# Altium PCB PCB1.PcbDoc (part 2 of 5)
Units mil, origin at the board's own origin, x right, y up, seen from the top; angles counter-clockwise.
Board outline 1280 x 1960 mil, 2 copper layers (Top Layer, Bottom Layer); 43 components, 63 nets, 300 pads, 93 vias.
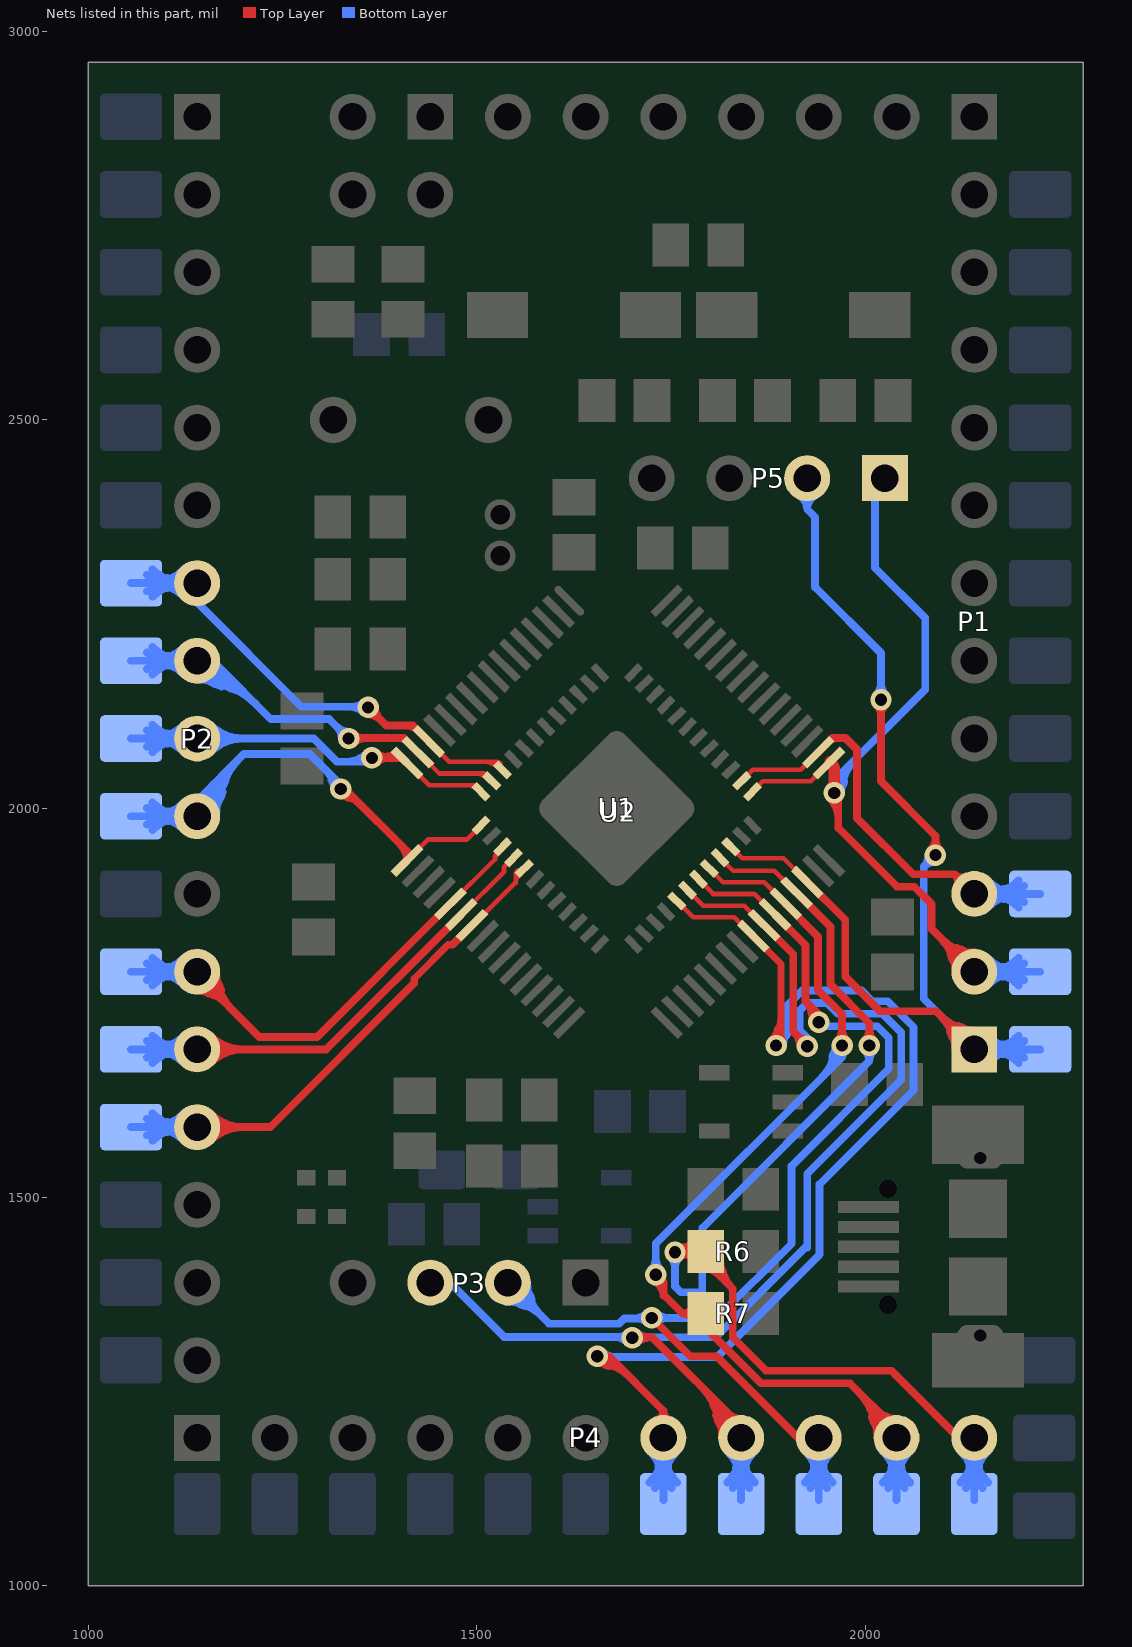
[diagram p2: the nets of this part, all layers, seen from the top]

## Via types
v1: diameter 27.56, hole 15.75, Top Layer to Bottom Layer, tented both sides, 87 vias
v2: diameter 23.62, hole 13.78, Top Layer to Bottom Layer, tented both sides, 6 vias

## Nets (pads, with @x,y where several pads share a name; then routed paths per layer and width w, separated by ;. In a path a pad name is that pad's centre, name@x,y a point inside that pad or via, vN(x,y) a via of type N, cw(c..) or ccw(c..) an arc to the next point about the centre after c; other vN are vias at no path point) (continued)
PA0: P2.7 pad.1@1055,2290 U1.10 U2.14 | length 1775.8
  Top Layer w6: U2.14@1438.08,2086.28 1464.37,2060 1522.56,2060 U1.10@1533.15,2049.41 ; 1518.76,2057.93 ccw(c1524.24,2067.44) U1.10@1527.08,2056.84 ; 1510.83,2060 cw(c1510.83,2038.23) 1526.22,2053.62 ccw(c1510.83,2038.23) 1510.83,2060 ; 1525.31,2060 cw(c1525.31,2052.71) 1530.47,2057.87 ccw(c1525.31,2052.71) 1525.31,2060
  Top Layer w10: v1@1358.8,2129.76 ccw(c1372.87,2132.64) 1369.15,2118.77 ; v1(1360,2130) 1383.34,2106.66 1417.71,2106.66 U2.14@1438.08,2086.28 ; v1@1360.24,2131.2 cw(c1357.36,2117.13) 1371.23,2120.85 ; 1374.99,2115.01 cw(c1389.98,2130) 1368.78,2130 ccw(c1389.98,2130) 1374.99,2115.01 ; 1374.99,2115.01 ccw(c1360,2100.02) 1360,2121.22 cw(c1360,2100.02) 1374.99,2115.01 ; 1408.89,2106.66 cw(c1408.89,2085.38) 1423.94,2100.43 ccw(c1408.89,2085.38) 1408.89,2106.66
  Bottom Layer w10: pad.1@1055,2290 P2.7@1140,2290 1140,2265 1274,2131 1359,2131 v1(1360,2130) ; P2.7@1116.78,2282.1 ccw(c1095.78,2274.96) 1101.52,2296.39 ccw(c1105.72,2312.07) P2.7@1119.38,2303.28 ; P2.7@1116.78,2297.9 cw(c1095.78,2305.04) 1101.52,2283.61 cw(c1105.72,2267.93) P2.7@1119.38,2276.72 ; pad.1@1080.79,2290 cw(c1080.79,2230.79) 1122.66,2272.66 ccw(c1080.79,2230.79) pad.1@1080.79,2290 ; pad.1@1080.79,2290 ccw(c1080.79,2349.21) 1122.66,2307.34 cw(c1080.79,2349.21) pad.1@1080.79,2290 ; pad.1@1086.36,2277.01 cw(c1099.56,2268.97) 1103.56,2283.9 ; pad.1@1086.36,2277.01 cw(c1099.56,2268.97) 1103.56,2283.9 ; pad.1@1086.36,2277.01 cw(c1099.56,2268.97) 1103.56,2283.9 ; pad.1@1086.36,2302.99 ccw(c1099.56,2311.03) 1103.56,2296.1 ; pad.1@1086.36,2302.99 ccw(c1099.56,2311.03) 1103.56,2296.1 ; pad.1@1086.36,2302.99 ccw(c1099.56,2311.03) 1103.56,2296.1 ; pad.1@1088.73,2282.12 cw(c1109.12,2275.35) 1103.56,2296.1 ; pad.1@1088.73,2282.12 cw(c1109.12,2275.35) 1103.56,2296.1 ; pad.1@1088.73,2282.12 cw(c1109.12,2275.35) 1103.56,2296.1 ; pad.1@1088.73,2297.88 ccw(c1109.12,2304.65) 1103.56,2283.9 ; pad.1@1088.73,2297.88 ccw(c1109.12,2304.65) 1103.56,2283.9 ; pad.1@1088.73,2297.88 ccw(c1109.12,2304.65) 1103.56,2283.9 ; 1101.21,2290 cw(c1101.21,2326.21) 1075.61,2300.61 ccw(c1101.21,2326.21) 1101.21,2290 ; 1101.21,2290 ccw(c1101.21,2253.79) 1075.61,2279.39 cw(c1101.21,2253.79) 1101.21,2290 ; 1104.93,2290 cw(c1104.93,2254.93) 1129.73,2279.73 ccw(c1104.93,2254.93) 1104.93,2290 ; 1104.93,2290 ccw(c1104.93,2325.07) 1129.73,2300.27 cw(c1104.93,2325.07) 1104.93,2290 ; P2.7@1125.36,2290 cw(c1125.36,2350.36) 1082.68,2307.68 ccw(c1125.36,2350.36) P2.7@1125.36,2290 ; P2.7@1125.36,2290 ccw(c1125.36,2229.64) 1082.68,2272.32 cw(c1125.36,2229.64) P2.7@1125.36,2290 ; 1336.39,2131 cw(c1336.39,2106.39) 1353.79,2123.79 ccw(c1336.39,2106.39) 1336.39,2131 ; 1341.22,2131 ccw(c1341.22,2148.78) 1353.79,2136.21 cw(c1341.22,2148.78) 1341.22,2131
PA1: P2.8 pad.1@1055,2190 U1.11 U2.15 | length 2194.5
  Top Layer w6: U2.15@1424.17,2072.36 1451.53,2045 1509.72,2045 U1.11@1519.23,2035.49 ; 1505.13,2043.85 ccw(c1510.22,2052.67) U1.11@1513.12,2042.9 ; 1499.52,2045 cw(c1499.52,2026.92) 1512.3,2039.7 ccw(c1499.52,2026.92) 1499.52,2045
  Top Layer w10: v1(1335,2090) 1335.66,2090.66 1405.87,2090.66 U2.15@1424.17,2072.36 ; v1@1341.21,2083.79 cw(c1357.79,2067.21) 1357.79,2090.66 ccw(c1357.79,2067.21) v1@1341.21,2083.79 ; v1@1341.21,2096.21 ccw(c1354.6,2109.6) 1354.6,2090.66 cw(c1354.6,2109.6) v1@1341.21,2096.21 ; 1400,2090.66 cw(c1400,2076.48) 1410.02,2086.51 ccw(c1400,2076.48) 1400,2090.66
  Bottom Layer w10: pad.1@1055,2190 P2.8@1140,2190 1160,2190 1235,2115 1310,2115 v1(1335,2090) ; P2.8@1116.78,2182.1 ccw(c1095.78,2174.96) 1101.52,2196.39 ccw(c1105.72,2212.07) P2.8@1119.38,2203.28 ; P2.8@1116.78,2197.9 cw(c1095.78,2205.04) 1101.52,2183.61 cw(c1105.72,2167.93) P2.8@1119.38,2176.72 ; P2.8@1135.03,2187.7 ccw(c1186.01,2211.29) 1171.47,2157.04 ; P2.8@1144.11,2191.9 ccw(c1211.26,2222.98) 1192.11,2151.51 ; P2.8@1144.3,2191.41 ccw(c1178.9,2202.74) 1169.48,2167.57 ; pad.1@1080.79,2190 cw(c1080.79,2130.79) 1122.66,2172.66 ccw(c1080.79,2130.79) pad.1@1080.79,2190 ; pad.1@1080.79,2190 ccw(c1080.79,2249.21) 1122.66,2207.34 cw(c1080.79,2249.21) pad.1@1080.79,2190 ; pad.1@1086.36,2177.01 cw(c1099.56,2168.97) 1103.56,2183.9 ; pad.1@1086.36,2177.01 cw(c1099.56,2168.97) 1103.56,2183.9 ; pad.1@1086.36,2177.01 cw(c1099.56,2168.97) 1103.56,2183.9 ; pad.1@1086.36,2202.99 ccw(c1099.56,2211.03) 1103.56,2196.1 ; pad.1@1086.36,2202.99 ccw(c1099.56,2211.03) 1103.56,2196.1 ; pad.1@1086.36,2202.99 ccw(c1099.56,2211.03) 1103.56,2196.1 ; pad.1@1088.73,2182.12 cw(c1109.12,2175.35) 1103.56,2196.1 ; pad.1@1088.73,2182.12 cw(c1109.12,2175.35) 1103.56,2196.1 ; pad.1@1088.73,2182.12 cw(c1109.12,2175.35) 1103.56,2196.1 ; pad.1@1088.73,2197.88 ccw(c1109.12,2204.65) 1103.56,2183.9 ; pad.1@1088.73,2197.88 ccw(c1109.12,2204.65) 1103.56,2183.9 ; pad.1@1088.73,2197.88 ccw(c1109.12,2204.65) 1103.56,2183.9 ; 1101.21,2190 cw(c1101.21,2226.21) 1075.61,2200.61 ccw(c1101.21,2226.21) 1101.21,2190 ; 1101.21,2190 ccw(c1101.21,2153.79) 1075.61,2179.39 cw(c1101.21,2153.79) 1101.21,2190 ; 1104.93,2190 cw(c1104.93,2154.93) 1129.73,2179.73 ccw(c1104.93,2154.93) 1104.93,2190 ; 1104.93,2190 ccw(c1104.93,2225.07) 1129.73,2200.27 cw(c1104.93,2225.07) 1104.93,2190 ; P2.8@1125.36,2190 cw(c1125.36,2250.36) 1082.68,2207.68 ccw(c1125.36,2250.36) P2.8@1125.36,2190 ; P2.8@1125.36,2190 ccw(c1125.36,2129.64) 1082.68,2172.32 cw(c1125.36,2129.64) P2.8@1125.36,2190 ; 1320.01,2104.99 cw(c1305.02,2090) 1326.22,2090 ccw(c1305.02,2090) 1320.01,2104.99 ; 1320.01,2104.99 ccw(c1335,2119.98) 1335,2098.78 cw(c1335,2119.98) 1320.01,2104.99 ; P2.8@1140,2165.47 cw(c1140,2057.97) 1216.01,2133.99 ccw(c1140,2057.97) P2.8@1140,2165.47 ; P2.8@1140,2175.47 cw(c1140,2092.12) 1198.94,2151.06 ccw(c1140,2092.12) P2.8@1140,2175.47 ; P2.8@1140,2185.47 cw(c1140,2126.26) 1181.87,2168.13 ccw(c1140,2126.26) P2.8@1140,2185.47
PA2: P2.9 pad.1@1055,2090 U1.12 U2.16 | length 1956.8
  Top Layer w6: U2.16@1410.25,2058.45 1438.69,2030 1496.89,2030 U1.12@1505.31,2021.58 ; 1492.86,2028.97 ccw(c1495.97,2034.36) U1.12@1498.85,2028.85 ; 1488.21,2030 cw(c1488.21,2015.61) 1498.39,2025.79 ccw(c1488.21,2015.61) 1488.21,2030
  Top Layer w10: v1(1365,2065) 1403.69,2065 U2.16@1410.25,2058.45 ; v1@1371.44,2070.96 ccw(c1381.62,2080.37) 1385.2,2066.99 ; v1@1371.44,2070.96 ccw(c1381.62,2080.37) 1385.2,2066.99 ; v1@1371.44,2070.96 ccw(c1381.62,2080.37) 1385.2,2066.99 ; 1386.2,2065 cw(c1386.2,2086.2) 1371.21,2071.21 ccw(c1386.2,2086.2) 1386.2,2065 ; 1386.2,2065 ccw(c1386.2,2043.8) 1371.21,2058.79 cw(c1386.2,2043.8) 1386.2,2065 ; v1@1377.78,2065 ccw(c1377.78,2090.91) 1396.1,2072.59 cw(c1377.78,2090.91) v1@1377.78,2065 ; U2.16@1401.93,2065 ccw(c1401.93,2066.77) 1403.17,2065.52 cw(c1401.93,2066.77) U2.16@1401.93,2065
  Bottom Layer w10: pad.1@1055,2090 P2.9@1140,2090 1290,2090 1320,2060 v1@1370,2060 ; P2.9@1116.78,2082.1 ccw(c1095.78,2074.96) 1101.52,2096.39 ccw(c1105.72,2112.07) P2.9@1119.38,2103.28 ; P2.9@1116.78,2097.9 cw(c1095.78,2105.04) 1101.52,2083.61 cw(c1105.72,2067.93) P2.9@1119.38,2076.72 ; pad.1@1080.79,2090 cw(c1080.79,2030.79) 1122.66,2072.66 ccw(c1080.79,2030.79) pad.1@1080.79,2090 ; pad.1@1080.79,2090 ccw(c1080.79,2149.21) 1122.66,2107.34 cw(c1080.79,2149.21) pad.1@1080.79,2090 ; pad.1@1086.36,2077.01 cw(c1099.56,2068.97) 1103.56,2083.9 ; pad.1@1086.36,2077.01 cw(c1099.56,2068.97) 1103.56,2083.9 ; pad.1@1086.36,2077.01 cw(c1099.56,2068.97) 1103.56,2083.9 ; pad.1@1086.36,2102.99 ccw(c1099.56,2111.03) 1103.56,2096.1 ; pad.1@1086.36,2102.99 ccw(c1099.56,2111.03) 1103.56,2096.1 ; pad.1@1086.36,2102.99 ccw(c1099.56,2111.03) 1103.56,2096.1 ; pad.1@1088.73,2082.12 cw(c1109.12,2075.35) 1103.56,2096.1 ; pad.1@1088.73,2082.12 cw(c1109.12,2075.35) 1103.56,2096.1 ; pad.1@1088.73,2082.12 cw(c1109.12,2075.35) 1103.56,2096.1 ; pad.1@1088.73,2097.88 ccw(c1109.12,2104.65) 1103.56,2083.9 ; pad.1@1088.73,2097.88 ccw(c1109.12,2104.65) 1103.56,2083.9 ; pad.1@1088.73,2097.88 ccw(c1109.12,2104.65) 1103.56,2083.9 ; 1101.21,2090 cw(c1101.21,2126.21) 1075.61,2100.61 ccw(c1101.21,2126.21) 1101.21,2090 ; 1101.21,2090 ccw(c1101.21,2053.79) 1075.61,2079.39 cw(c1101.21,2053.79) 1101.21,2090 ; 1104.93,2090 cw(c1104.93,2054.93) 1129.73,2079.73 ccw(c1104.93,2054.93) 1104.93,2090 ; 1104.93,2090 ccw(c1104.93,2125.07) 1129.73,2100.27 cw(c1104.93,2125.07) 1104.93,2090 ; P2.9@1125.36,2090 cw(c1125.36,2150.36) 1082.68,2107.68 ccw(c1125.36,2150.36) P2.9@1125.36,2090 ; P2.9@1125.36,2090 ccw(c1125.36,2029.64) 1082.68,2072.32 cw(c1125.36,2029.64) P2.9@1125.36,2090 ; 1175.07,2090 cw(c1175.07,2125.07) 1150.27,2100.27 ccw(c1175.07,2125.07) 1175.07,2090 ; 1175.07,2090 ccw(c1175.07,2054.93) 1150.27,2079.73 cw(c1175.07,2054.93) 1175.07,2090 ; 1199.21,2090 cw(c1199.21,2149.21) 1157.34,2107.34 ccw(c1199.21,2149.21) 1199.21,2090 ; 1199.21,2090 ccw(c1199.21,2030.79) 1157.34,2072.66 cw(c1199.21,2030.79) 1199.21,2090 ; 1331.73,2060 ccw(c1331.73,2098.27) 1358.79,2071.21 cw(c1331.73,2098.27) 1331.73,2060
PA3: P2.10 pad.1@1055,1990 U1.13 U2.17 | length 2241.7
  Top Layer w6: U2.17@1410.25,1933.17 1437.08,1960 1486.89,1960 U1.13@1505.31,1978.42
  Top Layer w10: v1@1323.86,2024.55 ccw(c1341.63,2031.52) 1336.69,2013.09 ; v1(1325,2025) 1330,2025 U2.17@1416.04,1938.96 ; v1@1325,2016.22 cw(c1325,1982.95) 1348.52,2006.48 ccw(c1325,1982.95) v1@1325,2016.22 ; 1402.05,1952.95 cw(c1382.28,1933.17) U2.17@1410.25,1933.17 ccw(c1382.28,1933.17) 1402.05,1952.95
  Bottom Layer w10: pad.1@1055,1990 P2.10@1140,1990 1140,2010 1200,2070 1285,2070 1330,2025 v1(1325,2025) ; P2.10@1116.78,1982.1 ccw(c1095.78,1974.96) 1101.52,1996.39 ccw(c1105.72,2012.07) P2.10@1119.38,2003.28 ; P2.10@1116.78,1997.9 cw(c1095.78,2005.04) 1101.52,1983.61 cw(c1105.72,1967.93) P2.10@1119.38,1976.72 ; P2.10@1138.1,1994.11 ccw(c1107.02,2061.26) 1178.49,2042.11 ; P2.10@1138.59,1994.3 ccw(c1127.26,2028.9) 1162.43,2019.48 ; P2.10@1142.3,1985.03 ccw(c1118.71,2036.01) 1172.96,2021.47 ; 1313.09,2036.69 ccw(c1331.52,2041.63) v1@1324.55,2023.86 ; pad.1@1080.79,1990 cw(c1080.79,1930.79) 1122.66,1972.66 ccw(c1080.79,1930.79) pad.1@1080.79,1990 ; pad.1@1080.79,1990 ccw(c1080.79,2049.21) 1122.66,2007.34 cw(c1080.79,2049.21) pad.1@1080.79,1990 ; pad.1@1086.36,1977.01 cw(c1099.56,1968.97) 1103.56,1983.9 ; pad.1@1086.36,1977.01 cw(c1099.56,1968.97) 1103.56,1983.9 ; pad.1@1086.36,1977.01 cw(c1099.56,1968.97) 1103.56,1983.9 ; pad.1@1086.36,2002.99 ccw(c1099.56,2011.03) 1103.56,1996.1 ; pad.1@1086.36,2002.99 ccw(c1099.56,2011.03) 1103.56,1996.1 ; pad.1@1086.36,2002.99 ccw(c1099.56,2011.03) 1103.56,1996.1 ; pad.1@1088.73,1982.12 cw(c1109.12,1975.35) 1103.56,1996.1 ; pad.1@1088.73,1982.12 cw(c1109.12,1975.35) 1103.56,1996.1 ; pad.1@1088.73,1982.12 cw(c1109.12,1975.35) 1103.56,1996.1 ; pad.1@1088.73,1997.88 ccw(c1109.12,2004.65) 1103.56,1983.9 ; pad.1@1088.73,1997.88 ccw(c1109.12,2004.65) 1103.56,1983.9 ; pad.1@1088.73,1997.88 ccw(c1109.12,2004.65) 1103.56,1983.9 ; 1101.21,1990 cw(c1101.21,2026.21) 1075.61,2000.61 ccw(c1101.21,2026.21) 1101.21,1990 ; 1101.21,1990 ccw(c1101.21,1953.79) 1075.61,1979.39 cw(c1101.21,1953.79) 1101.21,1990 ; 1104.93,1990 cw(c1104.93,1954.93) 1129.73,1979.73 ccw(c1104.93,1954.93) 1104.93,1990 ; 1104.93,1990 ccw(c1104.93,2025.07) 1129.73,2000.27 cw(c1104.93,2025.07) 1104.93,1990 ; P2.10@1125.36,1990 cw(c1125.36,2050.36) 1082.68,2007.68 ccw(c1125.36,2050.36) P2.10@1125.36,1990 ; P2.10@1125.36,1990 ccw(c1125.36,1929.64) 1082.68,1972.32 cw(c1125.36,1929.64) P2.10@1125.36,1990 ; P2.10@1144.53,1990 cw(c1203.74,1990) 1161.87,2031.87 ccw(c1203.74,1990) P2.10@1144.53,1990 ; P2.10@1154.53,1990 cw(c1237.88,1990) 1178.94,2048.94 ccw(c1237.88,1990) P2.10@1154.53,1990 ; P2.10@1164.53,1990 cw(c1272.03,1990) 1196.01,2066.01 ccw(c1272.03,1990) P2.10@1164.53,1990 ; 1306.48,2048.52 cw(c1282.95,2025) 1316.22,2025 ccw(c1282.95,2025) 1306.48,2048.52
PA5: P2.12 pad.1@1055,1790 U1.15 U2.21 | length 1949.7
  Top Layer w6: U2.21@1465.92,1877.49 1523.43,1935 1523.43,1938.43 ; 1524.81,1939.4 ccw(c1521.39,1942.64) U1.15@1525.79,1944.33 ; U1.15@1533.15,1950.59 1533.15,1948.15 1523.43,1938.43 ; 1523.43,1938.43 ccw(c1517.91,1943.95) 1525.67,1944.81 cw(c1517.91,1943.95) 1523.43,1938.43 ; 1523.43,1934.17 cw(c1534.23,1934.17) 1528.59,1943.38 ccw(c1534.23,1934.17) 1523.43,1934.17 ; 1523.43,1937.23 cw(c1529.54,1937.23) 1528.05,1943.15 ccw(c1529.54,1937.23) 1523.43,1937.23
  Top Layer w10: P2.12@1134.58,1789.23 ccw(c1169.71,1794.24) 1160.52,1759.97 ; P2.12@1140,1790 1140,1786 1220,1706 1294.43,1706 U2.21@1465.92,1877.49 ; P2.12@1141.39,1795.29 cw(c1130.83,1755.06) 1171,1765.83 ; P2.12@1140,1765.47 cw(c1140,1715.91) 1175.04,1750.96 ccw(c1140,1715.91) P2.12@1140,1765.47 ; P2.12@1154.53,1790 ccw(c1199.26,1790) 1167.63,1758.37 cw(c1199.26,1790) P2.12@1154.53,1790 ; P2.12@1164.53,1790 ccw(c1233.4,1790) 1184.7,1741.3 cw(c1233.4,1790) P2.12@1164.53,1790
  Bottom Layer w10: pad.1@1055,1790 P2.12@1140,1790 ; P2.12@1116.78,1782.1 ccw(c1095.78,1774.96) 1101.52,1796.39 ccw(c1105.72,1812.07) P2.12@1119.38,1803.28 ; P2.12@1116.78,1797.9 cw(c1095.78,1805.04) 1101.52,1783.61 cw(c1105.72,1767.93) P2.12@1119.38,1776.72 ; pad.1@1080.79,1790 cw(c1080.79,1730.79) 1122.66,1772.66 ccw(c1080.79,1730.79) pad.1@1080.79,1790 ; pad.1@1080.79,1790 ccw(c1080.79,1849.21) 1122.66,1807.34 cw(c1080.79,1849.21) pad.1@1080.79,1790 ; pad.1@1086.36,1777.01 cw(c1099.56,1768.97) 1103.56,1783.9 ; pad.1@1086.36,1777.01 cw(c1099.56,1768.97) 1103.56,1783.9 ; pad.1@1086.36,1777.01 cw(c1099.56,1768.97) 1103.56,1783.9 ; pad.1@1086.36,1802.99 ccw(c1099.56,1811.03) 1103.56,1796.1 ; pad.1@1086.36,1802.99 ccw(c1099.56,1811.03) 1103.56,1796.1 ; pad.1@1086.36,1802.99 ccw(c1099.56,1811.03) 1103.56,1796.1 ; pad.1@1088.73,1782.12 cw(c1109.12,1775.35) 1103.56,1796.1 ; pad.1@1088.73,1782.12 cw(c1109.12,1775.35) 1103.56,1796.1 ; pad.1@1088.73,1782.12 cw(c1109.12,1775.35) 1103.56,1796.1 ; pad.1@1088.73,1797.88 ccw(c1109.12,1804.65) 1103.56,1783.9 ; pad.1@1088.73,1797.88 ccw(c1109.12,1804.65) 1103.56,1783.9 ; pad.1@1088.73,1797.88 ccw(c1109.12,1804.65) 1103.56,1783.9 ; 1101.21,1790 cw(c1101.21,1826.21) 1075.61,1800.61 ccw(c1101.21,1826.21) 1101.21,1790 ; 1101.21,1790 ccw(c1101.21,1753.79) 1075.61,1779.39 cw(c1101.21,1753.79) 1101.21,1790 ; 1104.93,1790 cw(c1104.93,1754.93) 1129.73,1779.73 ccw(c1104.93,1754.93) 1104.93,1790 ; 1104.93,1790 ccw(c1104.93,1825.07) 1129.73,1800.27 cw(c1104.93,1825.07) 1104.93,1790 ; P2.12@1125.36,1790 cw(c1125.36,1850.36) 1082.68,1807.68 ccw(c1125.36,1850.36) P2.12@1125.36,1790 ; P2.12@1125.36,1790 ccw(c1125.36,1729.64) 1082.68,1772.32 cw(c1125.36,1729.64) P2.12@1125.36,1790
PA6: P2.13 pad.1@1055,1690 U1.16 U2.22 | length 1833.6
  Top Layer w6: U2.22@1479.84,1863.57 1535,1918.73 1535,1925 1546.67,1936.67 U1.16@1547.07,1936.67 ; 1537.53,1927.53 cw(c1541.5,1923.56) 1541.5,1929.18 ccw(c1541.5,1923.56) 1537.53,1927.53
  Top Layer w10: P2.13@1140,1690 1306.27,1690 U2.22@1479.84,1863.57 ; 1175.07,1690 cw(c1175.07,1725.07) 1150.27,1700.27 ccw(c1175.07,1725.07) 1175.07,1690 ; 1175.07,1690 ccw(c1175.07,1654.93) 1150.27,1679.73 cw(c1175.07,1654.93) 1175.07,1690 ; 1199.21,1690 cw(c1199.21,1749.21) 1157.34,1707.34 ccw(c1199.21,1749.21) 1199.21,1690 ; 1199.21,1690 ccw(c1199.21,1630.79) 1157.34,1672.66 cw(c1199.21,1630.79) 1199.21,1690
  Bottom Layer w10: pad.1@1055,1690 P2.13@1140,1690 ; P2.13@1116.78,1682.1 ccw(c1095.78,1674.96) 1101.52,1696.39 ccw(c1105.72,1712.07) P2.13@1119.38,1703.28 ; P2.13@1116.78,1697.9 cw(c1095.78,1705.04) 1101.52,1683.61 cw(c1105.72,1667.93) P2.13@1119.38,1676.72 ; pad.1@1080.79,1690 cw(c1080.79,1630.79) 1122.66,1672.66 ccw(c1080.79,1630.79) pad.1@1080.79,1690 ; pad.1@1080.79,1690 ccw(c1080.79,1749.21) 1122.66,1707.34 cw(c1080.79,1749.21) pad.1@1080.79,1690 ; pad.1@1086.36,1677.01 cw(c1099.56,1668.97) 1103.56,1683.9 ; pad.1@1086.36,1677.01 cw(c1099.56,1668.97) 1103.56,1683.9 ; pad.1@1086.36,1677.01 cw(c1099.56,1668.97) 1103.56,1683.9 ; pad.1@1086.36,1702.99 ccw(c1099.56,1711.03) 1103.56,1696.1 ; pad.1@1086.36,1702.99 ccw(c1099.56,1711.03) 1103.56,1696.1 ; pad.1@1086.36,1702.99 ccw(c1099.56,1711.03) 1103.56,1696.1 ; pad.1@1088.73,1682.12 cw(c1109.12,1675.35) 1103.56,1696.1 ; pad.1@1088.73,1682.12 cw(c1109.12,1675.35) 1103.56,1696.1 ; pad.1@1088.73,1682.12 cw(c1109.12,1675.35) 1103.56,1696.1 ; pad.1@1088.73,1697.88 ccw(c1109.12,1704.65) 1103.56,1683.9 ; pad.1@1088.73,1697.88 ccw(c1109.12,1704.65) 1103.56,1683.9 ; pad.1@1088.73,1697.88 ccw(c1109.12,1704.65) 1103.56,1683.9 ; 1101.21,1690 cw(c1101.21,1726.21) 1075.61,1700.61 ccw(c1101.21,1726.21) 1101.21,1690 ; 1101.21,1690 ccw(c1101.21,1653.79) 1075.61,1679.39 cw(c1101.21,1653.79) 1101.21,1690 ; 1104.93,1690 cw(c1104.93,1654.93) 1129.73,1679.73 ccw(c1104.93,1654.93) 1104.93,1690 ; 1104.93,1690 ccw(c1104.93,1725.07) 1129.73,1700.27 cw(c1104.93,1725.07) 1104.93,1690 ; P2.13@1125.36,1690 cw(c1125.36,1750.36) 1082.68,1707.68 ccw(c1125.36,1750.36) P2.13@1125.36,1690 ; P2.13@1125.36,1690 ccw(c1125.36,1629.64) 1082.68,1672.32 cw(c1125.36,1629.64) P2.13@1125.36,1690
PA7: P2.14 pad.1@1055,1590 U1.17 U2.23 | length 1955.7
  Top Layer w6: 1463.19,1825 1463.54,1825 ; U2.23@1493.76,1849.65 1494.65,1849.65 1550,1905 1550,1911.76 U1.17@1560.99,1922.75 ; 1551.69,1910.4 ccw(c1546.21,1915.45) U1.17@1553.53,1916.82 ; U2.23@1507.9,1865.8 ccw(c1507.9,1872.78) 1512.84,1867.84 cw(c1507.9,1872.78) U2.23@1507.9,1865.8 ; 1550,1903.85 cw(c1563.85,1903.85) 1556.45,1915.56 ccw(c1563.85,1903.85) 1550,1903.85 ; 1550,1909.52 cw(c1555.75,1909.52) 1555.5,1915.26 ccw(c1555.75,1909.52) 1550,1909.52 ; 1550,1914.74 cw(c1556.96,1914.74) 1553.24,1920.63 ccw(c1556.96,1914.74) 1550,1914.74
  Top Layer w9: 1419.55,1780.66 1419.55,1781.36 1463.19,1825
  Top Layer w10: P2.14@1140,1590 1234.11,1590 1419.55,1775.45 1419.55,1780.66 ; 1463.54,1824.65 1468.75,1824.65 U2.23@1493.76,1849.65 ; 1175.07,1590 cw(c1175.07,1625.07) 1150.27,1600.27 ccw(c1175.07,1625.07) 1175.07,1590 ; 1175.07,1590 ccw(c1175.07,1554.93) 1150.27,1579.73 cw(c1175.07,1554.93) 1175.07,1590 ; 1199.21,1590 cw(c1199.21,1649.21) 1157.34,1607.34 ccw(c1199.21,1649.21) 1199.21,1590 ; 1199.21,1590 ccw(c1199.21,1530.79) 1157.34,1572.66 cw(c1199.21,1530.79) 1199.21,1590
  Bottom Layer w10: pad.1@1055,1590 P2.14@1140,1590 ; P2.14@1116.78,1582.1 ccw(c1095.78,1574.96) 1101.52,1596.39 ccw(c1105.72,1612.07) P2.14@1119.38,1603.28 ; P2.14@1116.78,1597.9 cw(c1095.78,1605.04) 1101.52,1583.61 cw(c1105.72,1567.93) P2.14@1119.38,1576.72 ; pad.1@1080.79,1590 cw(c1080.79,1530.79) 1122.66,1572.66 ccw(c1080.79,1530.79) pad.1@1080.79,1590 ; pad.1@1080.79,1590 ccw(c1080.79,1649.21) 1122.66,1607.34 cw(c1080.79,1649.21) pad.1@1080.79,1590 ; pad.1@1086.36,1577.01 cw(c1099.56,1568.97) 1103.56,1583.9 ; pad.1@1086.36,1577.01 cw(c1099.56,1568.97) 1103.56,1583.9 ; pad.1@1086.36,1577.01 cw(c1099.56,1568.97) 1103.56,1583.9 ; pad.1@1086.36,1602.99 ccw(c1099.56,1611.03) 1103.56,1596.1 ; pad.1@1086.36,1602.99 ccw(c1099.56,1611.03) 1103.56,1596.1 ; pad.1@1086.36,1602.99 ccw(c1099.56,1611.03) 1103.56,1596.1 ; pad.1@1088.73,1582.12 cw(c1109.12,1575.35) 1103.56,1596.1 ; pad.1@1088.73,1582.12 cw(c1109.12,1575.35) 1103.56,1596.1 ; pad.1@1088.73,1582.12 cw(c1109.12,1575.35) 1103.56,1596.1 ; pad.1@1088.73,1597.88 ccw(c1109.12,1604.65) 1103.56,1583.9 ; pad.1@1088.73,1597.88 ccw(c1109.12,1604.65) 1103.56,1583.9 ; pad.1@1088.73,1597.88 ccw(c1109.12,1604.65) 1103.56,1583.9 ; 1101.21,1590 cw(c1101.21,1626.21) 1075.61,1600.61 ccw(c1101.21,1626.21) 1101.21,1590 ; 1101.21,1590 ccw(c1101.21,1553.79) 1075.61,1579.39 cw(c1101.21,1553.79) 1101.21,1590 ; 1104.93,1590 cw(c1104.93,1554.93) 1129.73,1579.73 ccw(c1104.93,1554.93) 1104.93,1590 ; 1104.93,1590 ccw(c1104.93,1625.07) 1129.73,1600.27 cw(c1104.93,1625.07) 1104.93,1590 ; P2.14@1125.36,1590 cw(c1125.36,1650.36) 1082.68,1607.68 ccw(c1125.36,1650.36) P2.14@1125.36,1590 ; P2.14@1125.36,1590 ccw(c1125.36,1529.64) 1082.68,1572.32 cw(c1125.36,1529.64) P2.14@1125.36,1590
PA8: P4.7 pad.1@1740,1105 U1.29 U2.41 | length 2845.3
  Top Layer w6: U1.29@1757.25,1880.99 1778.24,1860 1831.4,1860 U2.41@1855.67,1835.73 ; v1(1885,1695) v1@1893,1703
  Top Layer w9: U2.41@1855.67,1835.73 1891.5,1799.9 1891.5,1704.5 v1@1893,1703 ; 1887.39,1717.07 ccw(c1897.05,1711.5) v1@1890.47,1702.49 ; v1@1878.44,1701.56 ccw(c1846.9,1733.1) 1891.5,1733.1 cw(c1846.9,1733.1) v1@1878.44,1701.56 ; v1@1884.8,1695.2 ccw(c1868.63,1711.37) 1891.5,1711.37 cw(c1868.63,1711.37) v1@1884.8,1695.2
  Top Layer w10: v1@1653.94,1294.39 ccw(c1676.47,1307.39) 1669.73,1282.27 ; v1@1661.98,1289.67 cw(c1667.77,1285.25) 1669.66,1292.29 cw(c1672.13,1301.52) v1@1663.21,1298.12 ; 1670,1295 1740,1225 ; P4.7@1740,1190 1740,1225 ; 1740,1225 cw(c1727.29,1225) 1731.63,1213.06 ccw(c1727.29,1225) 1740,1225 ; 1740,1225 ccw(c1752.71,1225) 1748.37,1213.06 cw(c1752.71,1225) 1740,1225 ; v1@1655,1286.22 cw(c1655,1228.81) 1695.59,1269.41 ccw(c1655,1228.81) v1@1655,1286.22 ; v1@1655,1296.22 cw(c1655,1262.95) 1678.52,1286.48 ccw(c1655,1262.95) v1@1655,1296.22
  Bottom Layer w10: v1(1655,1295) 1655.78,1294.22 1809.22,1294.22 1941,1426 1941,1516.37 2062,1637.37 2062,1718.3 2028.52,1751.78 2009,1751.78 1995,1765.78 1918.59,1765.78 1899.22,1746.41 1899.22,1709.22 ; P4.7@1726.72,1169.38 cw(c1717.93,1155.72) 1733.61,1151.52 cw(c1755.04,1145.78) P4.7@1747.9,1166.78 ; P4.7@1732.1,1166.78 cw(c1724.96,1145.78) 1746.39,1151.52 cw(c1762.07,1155.72) P4.7@1753.28,1169.38 ; pad.1@1740,1110 P4.7@1740,1190 ; v1(1885,1695) 1899.22,1709.22 ; pad.1@1727.01,1136.36 ccw(c1718.97,1149.56) 1733.9,1153.56 ; pad.1@1727.01,1136.36 ccw(c1718.97,1149.56) 1733.9,1153.56 ; pad.1@1727.01,1136.36 ccw(c1718.97,1149.56) 1733.9,1153.56 ; pad.1@1732.12,1138.73 ccw(c1725.35,1159.12) 1746.1,1153.56 ; pad.1@1732.12,1138.73 ccw(c1725.35,1159.12) 1746.1,1153.56 ; pad.1@1732.12,1138.73 ccw(c1725.35,1159.12) 1746.1,1153.56 ; 1733.9,1153.56 ccw(c1754.65,1159.12) pad.1@1747.88,1138.73 ; 1733.9,1153.56 ccw(c1754.65,1159.12) pad.1@1747.88,1138.73 ; 1733.9,1153.56 ccw(c1754.65,1159.12) pad.1@1747.88,1138.73 ; pad.1@1740,1130.79 cw(c1799.21,1130.79) 1757.34,1172.66 ccw(c1799.21,1130.79) pad.1@1740,1130.79 ; pad.1@1740,1130.79 ccw(c1680.79,1130.79) 1722.66,1172.66 cw(c1680.79,1130.79) pad.1@1740,1130.79 ; 1740,1151.21 cw(c1703.79,1151.21) 1729.39,1125.61 ccw(c1703.79,1151.21) 1740,1151.21 ; 1740,1151.21 ccw(c1776.21,1151.21) 1750.61,1125.61 cw(c1776.21,1151.21) 1740,1151.21 ; 1740,1154.93 cw(c1775.07,1154.93) 1750.27,1179.73 ccw(c1775.07,1154.93) 1740,1154.93 ; 1740,1154.93 ccw(c1704.93,1154.93) 1729.73,1179.73 cw(c1704.93,1154.93) 1740,1154.93 ; P4.7@1740,1175.36 cw(c1679.64,1175.36) 1722.32,1132.68 ccw(c1679.64,1175.36) P4.7@1740,1175.36 ; P4.7@1740,1175.36 ccw(c1800.36,1175.36) 1757.68,1132.68 cw(c1800.36,1175.36) P4.7@1740,1175.36 ; 1746.1,1153.56 ccw(c1761.03,1149.56) pad.1@1752.99,1136.36 ; 1746.1,1153.56 ccw(c1761.03,1149.56) pad.1@1752.99,1136.36 ; 1746.1,1153.56 ccw(c1761.03,1149.56) pad.1@1752.99,1136.36 ; 1899.22,1709.22 cw(c1886.04,1722.4) 1885.33,1703.77 ccw(c1886.04,1722.4) 1899.22,1709.22 ; 1899.22,1709.22 ccw(c1912.4,1696.04) 1893.77,1695.33 cw(c1912.4,1696.04) 1899.22,1709.22 ; v1@1661.21,1288.79 cw(c1674.31,1275.69) 1674.31,1294.22 ccw(c1674.31,1275.69) v1@1661.21,1288.79 ; v1@1661.21,1301.21 ccw(c1678.08,1318.08) 1678.08,1294.22 cw(c1678.08,1318.08) v1@1661.21,1301.21
PA9: P3.3 P4.8 pad.1@1840,1105 U1.30 U2.42 | length 3460.8
  Top Layer w6: U1.30@1771.17,1894.91 1791.08,1875 1844.24,1875 U2.42@1869.59,1849.65
  Top Layer w10: v1@1695,1320 1695.31,1319.69 1725.31,1319.69 1840,1205 P4.8@1840,1190 ; 1802.46,1238.57 ccw(c1866.61,1255.76) P4.8@1841.7,1194.2 ; 1807.65,1219.19 ccw(c1857.18,1232.46) P4.8@1837.95,1184.93 ; 1818.35,1216.57 ccw(c1848.39,1224.62) P4.8@1841.07,1194.4 ; 1824.49,1218.68 cw(c1817.15,1191.29) P4.8@1845.46,1189.69 ; U2.42@1869.59,1849.65 1907,1812.24 1907,1713 v1@1920,1700 ; 1913.63,1703.66 ccw(c1928.34,1707.6) v1@1924.71,1692.81 ; 1916.35,1705.1 cw(c1912.85,1692.03) v1@1926.2,1694.2 ; v1@1706.21,1312.79 cw(c1722.87,1296.13) 1722.87,1319.69 ccw(c1722.87,1296.13) v1@1706.21,1312.79 ; v1@1706.21,1325.21 ccw(c1719.52,1338.52) 1719.52,1319.69 cw(c1719.52,1338.52) v1@1706.21,1325.21 ; 1787.52,1257.48 cw(c1720.04,1190) 1815.47,1190 ccw(c1720.04,1190) 1787.52,1257.48 ; 1804.59,1240.41 cw(c1754.19,1190) 1825.47,1190 ccw(c1754.19,1190) 1804.59,1240.41 ; 1821.66,1223.34 cw(c1788.33,1190) 1835.47,1190 ccw(c1788.33,1190) 1821.66,1223.34 ; 1823.74,1221.26 ccw(c1840,1237.53) 1840,1214.53 cw(c1840,1237.53) 1823.74,1221.26 ; 1909.31,1710.69 cw(c1892.61,1694) 1916.22,1694 ccw(c1892.61,1694) 1909.31,1710.69 ; 1911.72,1708.28 ccw(c1925,1721.56) 1925,1702.78 cw(c1925,1721.56) 1911.72,1708.28
  Bottom Layer w10: 1470,1385 1535,1320 1695,1320 1695.31,1319.69 1807.32,1319.69 1922.63,1435 1925,1435 1925,1530 2046,1651 2046,1711.67 2021.89,1735.78 1964.26,1735.78 1950.26,1749.78 1925.22,1749.78 1915.22,1739.78 1915.22,1714.74 ; P4.8@1826.72,1169.38 cw(c1817.93,1155.72) 1833.61,1151.52 cw(c1855.04,1145.78) P4.8@1847.9,1166.78 ; P4.8@1832.1,1166.78 cw(c1824.96,1145.78) 1846.39,1151.52 cw(c1862.07,1155.72) P4.8@1853.28,1169.38 ; P4.8@1835,1195 P4.8@1840,1190 pad.1@1840,1110 ; v1@1925,1690 1925,1704.96 1915.22,1714.74 ; pad.1@1827.01,1136.36 ccw(c1818.97,1149.56) 1833.9,1153.56 ; pad.1@1827.01,1136.36 ccw(c1818.97,1149.56) 1833.9,1153.56 ; pad.1@1827.01,1136.36 ccw(c1818.97,1149.56) 1833.9,1153.56 ; pad.1@1832.12,1138.73 ccw(c1825.35,1159.12) 1846.1,1153.56 ; pad.1@1832.12,1138.73 ccw(c1825.35,1159.12) 1846.1,1153.56 ; pad.1@1832.12,1138.73 ccw(c1825.35,1159.12) 1846.1,1153.56 ; 1833.9,1153.56 ccw(c1854.65,1159.12) pad.1@1847.88,1138.73 ; 1833.9,1153.56 ccw(c1854.65,1159.12) pad.1@1847.88,1138.73 ; 1833.9,1153.56 ccw(c1854.65,1159.12) pad.1@1847.88,1138.73 ; pad.1@1840,1130.79 cw(c1899.21,1130.79) 1857.34,1172.66 ccw(c1899.21,1130.79) pad.1@1840,1130.79 ; pad.1@1840,1130.79 ccw(c1780.79,1130.79) 1822.66,1172.66 cw(c1780.79,1130.79) pad.1@1840,1130.79 ; 1840,1151.21 cw(c1803.79,1151.21) 1829.39,1125.61 ccw(c1803.79,1151.21) 1840,1151.21 ; 1840,1151.21 ccw(c1876.21,1151.21) 1850.61,1125.61 cw(c1876.21,1151.21) 1840,1151.21 ; 1840,1154.93 cw(c1875.07,1154.93) 1850.27,1179.73 ccw(c1875.07,1154.93) 1840,1154.93 ; 1840,1154.93 ccw(c1804.93,1154.93) 1829.73,1179.73 cw(c1804.93,1154.93) 1840,1154.93 ; P4.8@1840,1175.36 cw(c1779.64,1175.36) 1822.32,1132.68 ccw(c1779.64,1175.36) P4.8@1840,1175.36 ; P4.8@1840,1175.36 ccw(c1900.36,1175.36) 1857.68,1132.68 cw(c1900.36,1175.36) P4.8@1840,1175.36 ; 1846.1,1153.56 ccw(c1861.03,1149.56) pad.1@1852.99,1136.36 ; 1846.1,1153.56 ccw(c1861.03,1149.56) pad.1@1852.99,1136.36 ; 1846.1,1153.56 ccw(c1861.03,1149.56) pad.1@1852.99,1136.36 ; 1915.22,1714.74 cw(c1905.63,1705.14) 1917.39,1698.38 ccw(c1905.63,1705.14) 1915.22,1714.74 ; 1676.39,1320 cw(c1676.39,1295.39) 1693.79,1312.79 ccw(c1676.39,1295.39) 1676.39,1320 ; 1681.22,1320 ccw(c1681.22,1337.78) 1693.79,1325.21 cw(c1681.22,1337.78) 1681.22,1320 ; v1@1706.21,1312.79 cw(c1722.87,1296.13) 1722.87,1319.69 ccw(c1722.87,1296.13) v1@1706.21,1312.79 ; v1@1706.21,1325.21 ccw(c1719.52,1338.52) 1719.52,1319.69 cw(c1719.52,1338.52) v1@1706.21,1325.21
  other v1: 1700,1319 1925,1694
PA10: P3.2 P4.9 pad.1@1940,1105 U1.31 U2.43 | length 3001.4
  Top Layer w6: U1.31@1785.09,1908.83 1803.92,1890 1857.08,1890 U2.43@1883.51,1863.57
  Top Layer w10: v1(1725,1344.47) 1774.47,1295 1808.44,1295 1913.44,1190 P4.9@1940,1190 ; U2.43@1883.51,1863.57 1923,1824.08 1923,1752 ; 1929.73,1741.54 ccw(c1955.6,1744.26) v1@1939.23,1724.05 ; v1@1945,1730 1923,1752 ; 1923,1752 cw(c1902.02,1731.01) 1931.33,1726.37 ccw(c1902.02,1731.01) 1923,1752
  Bottom Layer w10: P3.2@1534.64,1388.9 ccw(c1572.3,1396.61) 1562.35,1359.48 ; P3.2@1540,1390 1592.98,1337.02 1682.98,1337.02 1689.74,1343.78 1724.31,1343.78 v1(1725,1344.47) 1809.47,1344.47 1905,1440 1905,1540 2030,1665 2030,1705.04 2015.26,1719.78 1945.22,1719.78 v1(1940,1725) ; P3.2@1541.1,1395.36 cw(c1533.39,1357.7) 1570.52,1367.65 ; P4.9@1926.72,1169.38 cw(c1917.93,1155.72) 1933.61,1151.52 cw(c1955.04,1145.78) P4.9@1947.9,1166.78 ; P4.9@1932.1,1166.78 cw(c1924.96,1145.78) 1946.39,1151.52 cw(c1962.07,1155.72) P4.9@1953.28,1169.38 ; pad.1@1940,1110 P4.9@1940,1190 ; 1564.8,1365.2 cw(c1589.6,1390) 1554.53,1390 ccw(c1589.6,1390) 1564.8,1365.2 ; 1564.8,1365.2 ccw(c1540,1340.4) 1540,1375.47 cw(c1540,1340.4) 1564.8,1365.2 ; 1581.87,1348.13 cw(c1623.74,1390) 1564.53,1390 ccw(c1623.74,1390) 1581.87,1348.13 ; 1581.87,1348.13 ccw(c1540,1306.26) 1540,1365.47 cw(c1540,1306.26) 1581.87,1348.13 ; 1746.2,1344.47 cw(c1746.2,1365.67) 1731.21,1350.68 ccw(c1746.2,1365.67) 1746.2,1344.47 ; 1746.2,1344.47 ccw(c1746.2,1323.28) 1731.21,1338.26 cw(c1746.2,1323.28) 1746.2,1344.47 ; pad.1@1927.01,1136.36 ccw(c1918.97,1149.56) 1933.9,1153.56 ; pad.1@1927.01,1136.36 ccw(c1918.97,1149.56) 1933.9,1153.56 ; pad.1@1927.01,1136.36 ccw(c1918.97,1149.56) 1933.9,1153.56 ; pad.1@1932.12,1138.73 ccw(c1925.35,1159.12) 1946.1,1153.56 ; pad.1@1932.12,1138.73 ccw(c1925.35,1159.12) 1946.1,1153.56 ; pad.1@1932.12,1138.73 ccw(c1925.35,1159.12) 1946.1,1153.56 ; 1933.9,1153.56 ccw(c1954.65,1159.12) pad.1@1947.88,1138.73 ; 1933.9,1153.56 ccw(c1954.65,1159.12) pad.1@1947.88,1138.73 ; 1933.9,1153.56 ccw(c1954.65,1159.12) pad.1@1947.88,1138.73 ; pad.1@1940,1130.79 cw(c1999.21,1130.79) 1957.34,1172.66 ccw(c1999.21,1130.79) pad.1@1940,1130.79 ; pad.1@1940,1130.79 ccw(c1880.79,1130.79) 1922.66,1172.66 cw(c1880.79,1130.79) pad.1@1940,1130.79 ; 1940,1151.21 cw(c1903.79,1151.21) 1929.39,1125.61 ccw(c1903.79,1151.21) 1940,1151.21 ; 1940,1151.21 ccw(c1976.21,1151.21) 1950.61,1125.61 cw(c1976.21,1151.21) 1940,1151.21 ; 1940,1154.93 cw(c1975.07,1154.93) 1950.27,1179.73 ccw(c1975.07,1154.93) 1940,1154.93 ; 1940,1154.93 ccw(c1904.93,1154.93) 1929.73,1179.73 cw(c1904.93,1154.93) 1940,1154.93 ; P4.9@1940,1175.36 cw(c1879.64,1175.36) 1922.32,1132.68 ccw(c1879.64,1175.36) P4.9@1940,1175.36 ; P4.9@1940,1175.36 ccw(c2000.36,1175.36) 1957.68,1132.68 cw(c2000.36,1175.36) P4.9@1940,1175.36 ; 1946.1,1153.56 ccw(c1961.03,1149.56) pad.1@1952.99,1136.36 ; 1946.1,1153.56 ccw(c1961.03,1149.56) pad.1@1952.99,1136.36 ; 1946.1,1153.56 ccw(c1961.03,1149.56) pad.1@1952.99,1136.36 ; 1702.13,1343.78 ccw(c1702.13,1367.34) 1718.79,1350.68 cw(c1702.13,1367.34) 1702.13,1343.78 ; 1705.48,1343.78 cw(c1705.48,1324.95) 1718.79,1338.26 ccw(c1705.48,1324.95) 1705.48,1343.78
PA11: P4.10 pad.1@2040,1105 R7.1 U1.32 U2.44 | length 3195
  Top Layer w6: U1.32@1799.01,1922.75 1816.76,1905 1869.92,1905 U2.44@1897.43,1877.49
  Top Layer w10: v1(1730.22,1400) 1740,1390.22 ; U2.44@1897.43,1877.49 1897.43,1876.57 1939,1835 1939,1766 1970,1735 v1(1970,1695) ; 2003.31,1235.4 ccw(c2061.27,1250.93) P4.10@2041.49,1194.27 ; 2008.2,1217.14 ccw(c2053.73,1229.34) P4.10@2038.2,1184.83 ; 2019.05,1213.96 ccw(c2044.87,1220.87) P4.10@2040.71,1194.47 ; 2022.44,1219.23 cw(c2014.39,1189.2) P4.10@2045.47,1190.17 ; P4.10@2040,1190 2040,1200.5 1980,1260.5 1865.57,1260.5 1794.57,1331.5 R7.1@1794.57,1350 1765,1350 ; 1740,1390.22 cw(c1744.6,1394.82) 1738.48,1397.02 ccw(c1744.6,1394.82) 1740,1390.22 ; 1740,1390.22 ccw(c1735.4,1385.62) 1733.2,1391.74 cw(c1735.4,1385.62) 1740,1390.22 ; 1740,1390.22 1740,1375 1765,1350 ; 1765,1350 cw(c1765,1335.84) 1777.77,1341.96 ccw(c1765,1335.84) 1765,1350 ; 1765,1350 ccw(c1765,1364.16) 1777.77,1358.04 cw(c1765,1364.16) 1765,1350 ; 1970,1716.2 cw(c1948.8,1716.2) 1963.79,1701.21 ccw(c1948.8,1716.2) 1970,1716.2 ; 1970,1716.2 ccw(c1991.2,1716.2) 1976.21,1701.21 cw(c1991.2,1716.2) 1970,1716.2 ; v1@1727.12,1391.79 cw(c1720.09,1373.16) 1740,1373.16 ccw(c1720.09,1373.16) v1@1727.12,1391.79 ; v1@1730.65,1401.14 cw(c1725.55,1387.62) 1740,1387.62 ccw(c1725.55,1387.62) v1@1730.65,1401.14 ; 1990.7,1249.8 cw(c1930.91,1190) 2015.47,1190 ccw(c1930.91,1190) 1990.7,1249.8 ; 2007.78,1232.72 cw(c1965.05,1190) 2025.47,1190 ccw(c1965.05,1190) 2007.78,1232.72 ; 2016.05,1224.45 ccw(c2040,1248.39) 2040,1214.53 cw(c2040,1248.39) 2016.05,1224.45 ; 2024.85,1215.65 cw(c1999.19,1190) 2035.47,1190 ccw(c1999.19,1190) 2024.85,1215.65
  Bottom Layer w10: v1(1730.22,1400) 1730.22,1440.26 1970,1680.04 ; 1957.27,1680.27 cw(c1982.39,1673.53) v1@1969.39,1696.06 ; v1@1964.7,1688 cw(c1960.34,1682.26) 1967.31,1680.39 cw(c1976.43,1677.95) v1@1973.1,1686.78 ; v1(1970,1695) 1970,1680.04 ; P4.10@2026.72,1169.38 cw(c2017.93,1155.72) 2033.61,1151.52 cw(c2055.04,1145.78) P4.10@2047.9,1166.78 ; P4.10@2032.1,1166.78 cw(c2024.96,1145.78) 2046.39,1151.52 cw(c2062.07,1155.72) P4.10@2053.28,1169.38 ; pad.1@2040,1110 P4.10@2040,1190 ; 1730.22,1421.2 cw(c1709.02,1421.2) 1724.01,1406.21 ccw(c1709.02,1421.2) 1730.22,1421.2 ; 1730.22,1421.2 ccw(c1751.42,1421.2) 1736.43,1406.21 cw(c1751.42,1421.2) 1730.22,1421.2 ; 1970,1680.04 cw(c1978.35,1680.04) 1974.28,1687.33 ccw(c1978.35,1680.04) 1970,1680.04 ; 1970,1680.04 ccw(c1961.65,1680.04) 1965.72,1687.33 cw(c1961.65,1680.04) 1970,1680.04 ; pad.1@2027.01,1136.36 ccw(c2018.97,1149.56) 2033.9,1153.56 ; pad.1@2027.01,1136.36 ccw(c2018.97,1149.56) 2033.9,1153.56 ; pad.1@2027.01,1136.36 ccw(c2018.97,1149.56) 2033.9,1153.56 ; pad.1@2032.12,1138.73 ccw(c2025.35,1159.12) 2046.1,1153.56 ; pad.1@2032.12,1138.73 ccw(c2025.35,1159.12) 2046.1,1153.56 ; pad.1@2032.12,1138.73 ccw(c2025.35,1159.12) 2046.1,1153.56 ; 2033.9,1153.56 ccw(c2054.65,1159.12) pad.1@2047.88,1138.73 ; 2033.9,1153.56 ccw(c2054.65,1159.12) pad.1@2047.88,1138.73 ; 2033.9,1153.56 ccw(c2054.65,1159.12) pad.1@2047.88,1138.73 ; pad.1@2040,1130.79 cw(c2099.21,1130.79) 2057.34,1172.66 ccw(c2099.21,1130.79) pad.1@2040,1130.79 ; pad.1@2040,1130.79 ccw(c1980.79,1130.79) 2022.66,1172.66 cw(c1980.79,1130.79) pad.1@2040,1130.79 ; 2040,1151.21 cw(c2003.79,1151.21) 2029.39,1125.61 ccw(c2003.79,1151.21) 2040,1151.21 ; 2040,1151.21 ccw(c2076.21,1151.21) 2050.61,1125.61 cw(c2076.21,1151.21) 2040,1151.21 ; 2040,1154.93 cw(c2075.07,1154.93) 2050.27,1179.73 ccw(c2075.07,1154.93) 2040,1154.93 ; 2040,1154.93 ccw(c2004.93,1154.93) 2029.73,1179.73 cw(c2004.93,1154.93) 2040,1154.93 ; P4.10@2040,1175.36 cw(c1979.64,1175.36) 2022.32,1132.68 ccw(c1979.64,1175.36) P4.10@2040,1175.36 ; P4.10@2040,1175.36 ccw(c2100.36,1175.36) 2057.68,1132.68 cw(c2100.36,1175.36) P4.10@2040,1175.36 ; 2046.1,1153.56 ccw(c2061.03,1149.56) pad.1@2052.99,1136.36 ; 2046.1,1153.56 ccw(c2061.03,1149.56) pad.1@2052.99,1136.36 ; 2046.1,1153.56 ccw(c2061.03,1149.56) pad.1@2052.99,1136.36 ; 1944.44,1654.48 ccw(c1903.92,1695) 1961.22,1695 cw(c1903.92,1695) 1944.44,1654.48 ; 1961.51,1671.55 ccw(c1938.06,1695) 1971.22,1695 cw(c1938.06,1695) 1961.51,1671.55
PA12: P4.11 pad.1@2140,1105 R6.1 U1.33 U2.45 | length 3171.6
  Top Layer w6: U1.33@1812.93,1936.67 1829.6,1920 1882.76,1920 U2.45@1911.34,1891.41
  Top Layer w10: R6.1@1777.75,1425.94 ccw(c1763.71,1419.27) 1763.71,1434.82 ccw(c1763.71,1451.9) R6.1@1778.47,1443.3 ; R6.1@1795.21,1427.28 cw(c1773.34,1386.2) 1818.99,1395.22 ; U2.45@1911.34,1891.41 1955,1847.76 1955,1773.76 2005,1723.76 v1(2005,1695) ; P4.11@2145,1195 2145,1190 P4.11@2140,1190 2120,1190 2033.5,1276.5 1872.2,1276.5 1829.19,1319.51 1829.19,1382.12 ; v1@1755,1430 cw(c1755,1397.28) 1780.22,1418.13 ccw(c1755,1397.28) v1@1755,1430 ; v1@1755,1430 ccw(c1755,1462.72) 1780.22,1441.87 cw(c1755,1462.72) v1@1755,1430 ; v1@1755,1430 R6.1@1794.57,1430 1794.57,1416.74 1829.19,1382.12 ; v1@1759.39,1436.6 ccw(c1768.34,1452.1) R6.1@1772.97,1434.82 ; v1@1759.39,1436.6 ccw(c1768.34,1452.1) R6.1@1772.97,1434.82 ; v1@1759.39,1436.6 ccw(c1768.34,1452.1) R6.1@1772.97,1434.82 ; v1@1761.82,1423.48 cw(c1767.77,1418.67) 1769.74,1426.05 ; v1@1761.82,1423.48 cw(c1767.77,1418.67) 1769.74,1426.05 ; v1@1761.82,1423.48 cw(c1767.77,1418.67) 1769.74,1426.05 ; v1@1763.23,1425.94 cw(c1776.69,1420.95) R6.1@1772.98,1434.82 ; v1@1763.23,1425.94 cw(c1776.69,1420.95) R6.1@1772.98,1434.82 ; v1@1763.23,1425.94 cw(c1776.69,1420.95) R6.1@1772.98,1434.82 ; v1@1763.25,1432 ccw(c1772.21,1435.26) 1769.74,1426.05 ; v1@1763.25,1432 ccw(c1772.21,1435.26) 1769.74,1426.05 ; v1@1763.25,1432 ccw(c1772.21,1435.26) 1769.74,1426.05 ; 1829.19,1382.12 cw(c1868.21,1421.14) 1813.15,1424.82 ccw(c1868.21,1421.14) 1829.19,1382.12 ; 2005,1716.2 cw(c1983.8,1716.2) 1998.79,1701.21 ccw(c1983.8,1716.2) 2005,1716.2 ; 2005,1716.2 ccw(c2026.2,1716.2) 2011.21,1701.21 cw(c2026.2,1716.2) 2005,1716.2 ; v1@1761.21,1422.79 cw(c1778.61,1405.39) 1778.61,1430 ccw(c1778.61,1405.39) v1@1761.21,1422.79 ; v1@1761.21,1435.21 ccw(c1773.78,1447.78) 1773.78,1430 cw(c1773.78,1447.78) v1@1761.21,1435.21 ; R6.1@1794.57,1407.44 cw(c1794.57,1384.99) 1810.44,1400.87 ccw(c1794.57,1384.99) R6.1@1794.57,1407.44 ; R6.1@1803.17,1425.49 ccw(c1839,1423.09) 1813.61,1397.7 cw(c1839,1423.09) R6.1@1803.17,1425.49
  Bottom Layer w10: v1@1755,1430 1755,1385 1762.5,1377.5 1790,1377.5 1790,1460 2005,1675 ; v1(2005,1695) 2005,1675 ; P4.11@2126.72,1169.38 cw(c2117.93,1155.72) 2133.61,1151.52 cw(c2155.04,1145.78) P4.11@2147.9,1166.78 ; P4.11@2132.1,1166.78 cw(c2124.96,1145.78) 2146.39,1151.52 cw(c2162.07,1155.72) P4.11@2153.28,1169.38 ; pad.1@2140,1110 P4.11@2140,1190 ; 1755,1407.8 cw(c1776.2,1407.8) 1761.21,1422.79 ccw(c1776.2,1407.8) 1755,1407.8 ; 1755,1407.8 ccw(c1733.8,1407.8) 1748.79,1422.79 cw(c1733.8,1407.8) 1755,1407.8 ; 2005,1675 cw(c2023.39,1675) 2010.94,1688.54 ccw(c2023.39,1675) 2005,1675 ; 2005,1675 ccw(c1986.61,1675) 1999.06,1688.54 cw(c1986.61,1675) 2005,1675 ; pad.1@2127.01,1136.36 ccw(c2118.97,1149.56) 2133.9,1153.56 ; pad.1@2127.01,1136.36 ccw(c2118.97,1149.56) 2133.9,1153.56 ; pad.1@2127.01,1136.36 ccw(c2118.97,1149.56) 2133.9,1153.56 ; pad.1@2132.12,1138.73 ccw(c2125.35,1159.12) 2146.1,1153.56 ; pad.1@2132.12,1138.73 ccw(c2125.35,1159.12) 2146.1,1153.56 ; pad.1@2132.12,1138.73 ccw(c2125.35,1159.12) 2146.1,1153.56 ; 2133.9,1153.56 ccw(c2154.65,1159.12) pad.1@2147.88,1138.73 ; 2133.9,1153.56 ccw(c2154.65,1159.12) pad.1@2147.88,1138.73 ; 2133.9,1153.56 ccw(c2154.65,1159.12) pad.1@2147.88,1138.73 ; pad.1@2140,1130.79 cw(c2199.21,1130.79) 2157.34,1172.66 ccw(c2199.21,1130.79) pad.1@2140,1130.79 ; pad.1@2140,1130.79 ccw(c2080.79,1130.79) 2122.66,1172.66 cw(c2080.79,1130.79) pad.1@2140,1130.79 ; 2140,1151.21 cw(c2103.79,1151.21) 2129.39,1125.61 ccw(c2103.79,1151.21) 2140,1151.21 ; 2140,1151.21 ccw(c2176.21,1151.21) 2150.61,1125.61 cw(c2176.21,1151.21) 2140,1151.21 ; 2140,1154.93 cw(c2175.07,1154.93) 2150.27,1179.73 ccw(c2175.07,1154.93) 2140,1154.93 ; 2140,1154.93 ccw(c2104.93,1154.93) 2129.73,1179.73 cw(c2104.93,1154.93) 2140,1154.93 ; P4.11@2140,1175.36 cw(c2079.64,1175.36) 2122.32,1132.68 ccw(c2079.64,1175.36) P4.11@2140,1175.36 ; P4.11@2140,1175.36 ccw(c2200.36,1175.36) 2157.68,1132.68 cw(c2200.36,1175.36) P4.11@2140,1175.36 ; 2146.1,1153.56 ccw(c2161.03,1149.56) pad.1@2152.99,1136.36 ; 2146.1,1153.56 ccw(c2161.03,1149.56) pad.1@2152.99,1136.36 ; 2146.1,1153.56 ccw(c2161.03,1149.56) pad.1@2152.99,1136.36
  other v1: 1755,1429
PA13: P1.1 P5.2 pad.1@2225,1690 U1.34 U2.46 | length 3434.4
  Top Layer w6: U1.34@1826.85,1950.59 1841.44,1936 1894.6,1936 U2.46@1925.26,1905.33
  Top Layer w10: U2.46@1925.26,1905.33 1974,1856.6 1974,1783.83 2018.83,1739 2091,1739 P1.1@2140,1690 ; v1(2020,2140) 2020,2035 2090,1965 v1(2090,1940) ; 2109.48,1712.35 ccw(c2146.61,1722.3) P1.1@2138.9,1684.64 ; 2117.65,1720.52 cw(c2107.7,1683.39) P1.1@2145.36,1691.1 ; 2020,2118.8 cw(c2041.2,2118.8) 2026.21,2133.79 ccw(c2041.2,2118.8) 2020,2118.8 ; 2020,2118.8 ccw(c1998.8,2118.8) 2013.79,2133.79 cw(c1998.8,2118.8) 2020,2118.8 ; 2090,1961.2 cw(c2068.8,1961.2) 2083.79,1946.21 ccw(c2068.8,1961.2) 2090,1961.2 ; 2090,1961.2 ccw(c2111.2,1961.2) 2096.21,1946.21 cw(c2111.2,1961.2) 2090,1961.2 ; 2098.13,1731.87 cw(c2056.26,1690) 2115.47,1690 ccw(c2056.26,1690) 2098.13,1731.87 ; 2098.13,1731.87 ccw(c2140,1773.74) 2140,1714.53 cw(c2140,1773.74) 2098.13,1731.87 ; P1.1@2115.2,1714.8 cw(c2090.4,1690) 2125.47,1690 ccw(c2090.4,1690) P1.1@2115.2,1714.8 ; P1.1@2115.2,1714.8 ccw(c2140,1739.6) 2140,1704.53 cw(c2140,1739.6) P1.1@2115.2,1714.8
  Bottom Layer w10: P5.2@1925,2425 1925,2385 ; v1(2020,2140) 2020,2200 1935.22,2284.78 1935.22,2374.78 1925,2385 ; v1(2090,1940) 2075,1925 ; 2109.48,1712.35 ccw(c2146.61,1722.3) P1.1@2138.9,1684.64 ; 2117.65,1720.52 cw(c2107.7,1683.39) P1.1@2145.36,1691.1 ; P1.1@2160.62,1676.72 cw(c2174.28,1667.93) 2178.48,1683.61 cw(c2184.22,1705.04) P1.1@2163.22,1697.9 ; P1.1@2160.62,1703.28 ccw(c2174.28,1712.07) 2178.48,1696.39 ccw(c2184.22,1674.96) P1.1@2163.22,1682.1 ; pad.1@2225,1690 P1.1@2140,1690 2075,1755 2075,1925 ; 1925,2385 cw(c1945.35,2385) 1936.12,2403.14 ccw(c1945.35,2385) 1925,2385 ; 1925,2385 ccw(c1904.65,2385) 1913.88,2403.14 cw(c1904.65,2385) 1925,2385 ; 2020,2161.2 cw(c1998.8,2161.2) 2013.79,2146.21 ccw(c1998.8,2161.2) 2020,2161.2 ; 2020,2161.2 ccw(c2041.2,2161.2) 2026.21,2146.21 cw(c2041.2,2161.2) 2020,2161.2 ; 2075.01,1925.01 cw(c2090,1910.02) 2090,1931.22 ccw(c2090,1910.02) 2075.01,1925.01 ; 2075.01,1925.01 ccw(c2060.02,1940) 2081.22,1940 cw(c2060.02,1940) 2075.01,1925.01 ; 2098.13,1731.87 cw(c2056.26,1690) 2115.47,1690 ccw(c2056.26,1690) 2098.13,1731.87 ; 2098.13,1731.87 ccw(c2140,1773.74) 2140,1714.53 cw(c2140,1773.74) 2098.13,1731.87 ; P1.1@2115.2,1714.8 cw(c2090.4,1690) 2125.47,1690 ccw(c2090.4,1690) P1.1@2115.2,1714.8 ; P1.1@2115.2,1714.8 ccw(c2140,1739.6) 2140,1704.53 cw(c2140,1739.6) P1.1@2115.2,1714.8 ; P1.1@2154.64,1690 cw(c2154.64,1629.64) 2197.32,1672.32 ccw(c2154.64,1629.64) P1.1@2154.64,1690 ; P1.1@2154.64,1690 ccw(c2154.64,1750.36) 2197.32,1707.68 cw(c2154.64,1750.36) P1.1@2154.64,1690 ; 2175.07,1690 cw(c2175.07,1725.07) 2150.27,1700.27 ccw(c2175.07,1725.07) 2175.07,1690 ; 2175.07,1690 ccw(c2175.07,1654.93) 2150.27,1679.73 cw(c2175.07,1654.93) 2175.07,1690 ; 2176.44,1683.9 cw(c2180.44,1668.97) pad.1@2193.64,1677.01 ; 2176.44,1683.9 ccw(c2170.88,1704.65) pad.1@2191.27,1697.88 ; 2176.44,1683.9 cw(c2180.44,1668.97) pad.1@2193.64,1677.01 ; 2176.44,1683.9 ccw(c2170.88,1704.65) pad.1@2191.27,1697.88 ; 2176.44,1683.9 cw(c2180.44,1668.97) pad.1@2193.64,1677.01 ; 2176.44,1683.9 ccw(c2170.88,1704.65) pad.1@2191.27,1697.88 ; 2176.44,1696.1 cw(c2170.88,1675.35) pad.1@2191.27,1682.12 ; 2176.44,1696.1 ccw(c2180.44,1711.03) pad.1@2193.64,1702.99 ; 2176.44,1696.1 cw(c2170.88,1675.35) pad.1@2191.27,1682.12 ; 2176.44,1696.1 ccw(c2180.44,1711.03) pad.1@2193.64,1702.99 ; 2176.44,1696.1 cw(c2170.88,1675.35) pad.1@2191.27,1682.12 ; 2176.44,1696.1 ccw(c2180.44,1711.03) pad.1@2193.64,1702.99 ; 2178.79,1690 cw(c2178.79,1653.79) 2204.39,1679.39 ccw(c2178.79,1653.79) 2178.79,1690 ; 2178.79,1690 ccw(c2178.79,1726.21) 2204.39,1700.61 cw(c2178.79,1726.21) 2178.79,1690 ; pad.1@2199.21,1690 cw(c2199.21,1749.21) 2157.34,1707.34 ccw(c2199.21,1749.21) pad.1@2199.21,1690 ; pad.1@2199.21,1690 ccw(c2199.21,1630.79) 2157.34,1672.66 cw(c2199.21,1630.79) pad.1@2199.21,1690
PA14: P1.2 P5.1 pad.1@2225,1790 U1.37 U2.49 | length 2710.9
  Top Layer w6: U1.37@1854.69,2021.58 1868.11,2035 1929.66,2035 U2.49@1953.1,2058.45
  Top Layer w10: v1@1965,2015 1965,1975 2040.78,1899.22 2062.95,1899.22 2085,1877.17 2085,1845 P1.2@2140,1790 ; 2109.48,1812.35 ccw(c2146.61,1822.3) P1.2@2138.9,1784.64 ; 2117.65,1820.52 cw(c2107.7,1783.39) P1.2@2145.36,1791.1 ; 2098.13,1831.87 cw(c2056.26,1790) 2115.47,1790 ccw(c2056.26,1790) 2098.13,1831.87 ; 2098.13,1831.87 ccw(c2140,1873.74) 2140,1814.53 cw(c2140,1873.74) 2098.13,1831.87 ; 2115.2,1814.8 cw(c2090.4,1790) 2125.47,1790 ccw(c2090.4,1790) 2115.2,1814.8 ; 2115.2,1814.8 ccw(c2140,1839.6) 2140,1804.53 cw(c2140,1839.6) 2115.2,1814.8 ; v1@1953.79,2013.79 cw(c1926.73,1986.73) 1965,1986.73 ccw(c1926.73,1986.73) v1@1953.79,2013.79
  Top Layer w15: U2.49@1955.1,2058.45 1960,2051.55 v1@1960,2023.45 ; 1960,2035.16 cw(c1944.84,2035.16) 1955.56,2024.44 ccw(c1944.84,2035.16) 1960,2035.16 ; 1960,2035.16 ccw(c1975.16,2035.16) 1964.44,2024.44 cw(c1975.16,2035.16) 1960,2035.16 ; U2.49@1954.76,2060.32 cw(c1944.48,2048.69) 1960,2048.69 ccw(c1944.48,2048.69) U2.49@1954.76,2060.32
  Bottom Layer w10: v1@1956.32,2027.97 ccw(c1951.15,2039.16) 1963.06,2035.97 ccw(c1972.15,2033.54) v1@1965.86,2026.53 ; v1(1960,2020) 1960,2036.09 ; v1@1960.61,2018.94 ccw(c1947.61,2041.47) 1972.73,2034.73 ; P5.1@2025,2425 2012.22,2412.22 2012.22,2309.74 2076.96,2245 2076.96,2153.04 1960,2036.09 ; P1.2@2140,1790 pad.1@2225,1790 ; P1.2@2160.62,1776.72 cw(c2174.28,1767.93) 2178.48,1783.61 cw(c2184.22,1805.04) P1.2@2163.22,1797.9 ; P1.2@2160.62,1803.28 ccw(c2174.28,1812.07) 2178.48,1796.39 ccw(c2184.22,1774.96) P1.2@2163.22,1782.1 ; 1960,2036.09 cw(c1949.65,2036.09) 1955.25,2027.38 ccw(c1949.65,2036.09) 1960,2036.09 ; 1960,2036.09 ccw(c1970.35,2036.09) 1964.75,2027.38 cw(c1970.35,2036.09) 1960,2036.09 ; P1.2@2154.64,1790 cw(c2154.64,1729.64) 2197.32,1772.32 ccw(c2154.64,1729.64) P1.2@2154.64,1790 ; P1.2@2154.64,1790 ccw(c2154.64,1850.36) 2197.32,1807.68 cw(c2154.64,1850.36) P1.2@2154.64,1790 ; 2175.07,1790 cw(c2175.07,1825.07) 2150.27,1800.27 ccw(c2175.07,1825.07) 2175.07,1790 ; 2175.07,1790 ccw(c2175.07,1754.93) 2150.27,1779.73 cw(c2175.07,1754.93) 2175.07,1790 ; 2176.44,1783.9 cw(c2180.44,1768.97) pad.1@2193.64,1777.01 ; 2176.44,1783.9 ccw(c2170.88,1804.65) pad.1@2191.27,1797.88 ; 2176.44,1783.9 cw(c2180.44,1768.97) pad.1@2193.64,1777.01 ; 2176.44,1783.9 ccw(c2170.88,1804.65) pad.1@2191.27,1797.88 ; 2176.44,1783.9 cw(c2180.44,1768.97) pad.1@2193.64,1777.01 ; 2176.44,1783.9 ccw(c2170.88,1804.65) pad.1@2191.27,1797.88 ; 2176.44,1796.1 cw(c2170.88,1775.35) pad.1@2191.27,1782.12 ; 2176.44,1796.1 ccw(c2180.44,1811.03) pad.1@2193.64,1802.99 ; 2176.44,1796.1 cw(c2170.88,1775.35) pad.1@2191.27,1782.12 ; 2176.44,1796.1 ccw(c2180.44,1811.03) pad.1@2193.64,1802.99 ; 2176.44,1796.1 cw(c2170.88,1775.35) pad.1@2191.27,1782.12 ; 2176.44,1796.1 ccw(c2180.44,1811.03) pad.1@2193.64,1802.99 ; 2178.79,1790 cw(c2178.79,1753.79) 2204.39,1779.39 ccw(c2178.79,1753.79) 2178.79,1790 ; 2178.79,1790 ccw(c2178.79,1826.21) 2204.39,1800.61 cw(c2178.79,1826.21) 2178.79,1790 ; pad.1@2199.21,1790 cw(c2199.21,1849.21) 2157.34,1807.34 ccw(c2199.21,1849.21) pad.1@2199.21,1790 ; pad.1@2199.21,1790 ccw(c2199.21,1730.79) 2157.34,1772.66 cw(c2199.21,1730.79) pad.1@2199.21,1790 ; v1@1958.78,2020 cw(c1994.67,2020) 1969.29,2045.38 ccw(c1994.67,2020) v1@1958.78,2020 ; v1@1968.78,2020 cw(c2028.81,2020) 1986.36,2062.45 ccw(c2028.81,2020) v1@1968.78,2020
PA15: P1.3 pad.1@2225,1890 U1.38 U2.50 | length 1560.7
  Top Layer w6: U1.38@1840.77,2035.49 1855,2049.72 1916.54,2049.72 U2.50@1939.18,2072.36
  Top Layer w10: U2.50@1939.18,2072.36 1957.48,2090.66 1974.34,2090.66 1989.22,2075.78 1989.22,1987.55 2061.55,1915.22 2114.78,1915.22 ; P1.3@2140,1890 2114.78,1915.22 ; 2114.78,1915.22 cw(c2105.12,1905.56) 2117.6,1899.99 ccw(c2105.12,1905.56) 2114.78,1915.22 ; 2114.78,1915.22 ccw(c2124.44,1924.88) 2130.01,1912.4 cw(c2124.44,1924.88) 2114.78,1915.22 ; U2.50@1953.33,2086.51 cw(c1963.35,2076.48) 1963.35,2090.66 ccw(c1963.35,2076.48) U2.50@1953.33,2086.51
  Bottom Layer w10: P1.3@2140,1890 pad.1@2225,1890 ; P1.3@2160.62,1876.72 cw(c2174.28,1867.93) 2178.48,1883.61 cw(c2184.22,1905.04) P1.3@2163.22,1897.9 ; P1.3@2160.62,1903.28 ccw(c2174.28,1912.07) 2178.48,1896.39 ccw(c2184.22,1874.96) P1.3@2163.22,1882.1 ; P1.3@2154.64,1890 cw(c2154.64,1829.64) 2197.32,1872.32 ccw(c2154.64,1829.64) P1.3@2154.64,1890 ; P1.3@2154.64,1890 ccw(c2154.64,1950.36) 2197.32,1907.68 cw(c2154.64,1950.36) P1.3@2154.64,1890 ; 2175.07,1890 cw(c2175.07,1925.07) 2150.27,1900.27 ccw(c2175.07,1925.07) 2175.07,1890 ; 2175.07,1890 ccw(c2175.07,1854.93) 2150.27,1879.73 cw(c2175.07,1854.93) 2175.07,1890 ; 2176.44,1883.9 cw(c2180.44,1868.97) pad.1@2193.64,1877.01 ; 2176.44,1883.9 ccw(c2170.88,1904.65) pad.1@2191.27,1897.88 ; 2176.44,1883.9 cw(c2180.44,1868.97) pad.1@2193.64,1877.01 ; 2176.44,1883.9 ccw(c2170.88,1904.65) pad.1@2191.27,1897.88 ; 2176.44,1883.9 cw(c2180.44,1868.97) pad.1@2193.64,1877.01 ; 2176.44,1883.9 ccw(c2170.88,1904.65) pad.1@2191.27,1897.88 ; 2176.44,1896.1 cw(c2170.88,1875.35) pad.1@2191.27,1882.12 ; 2176.44,1896.1 ccw(c2180.44,1911.03) pad.1@2193.64,1902.99 ; 2176.44,1896.1 cw(c2170.88,1875.35) pad.1@2191.27,1882.12 ; 2176.44,1896.1 ccw(c2180.44,1911.03) pad.1@2193.64,1902.99 ; 2176.44,1896.1 cw(c2170.88,1875.35) pad.1@2191.27,1882.12 ; 2176.44,1896.1 ccw(c2180.44,1911.03) pad.1@2193.64,1902.99 ; 2178.79,1890 cw(c2178.79,1853.79) 2204.39,1879.39 ccw(c2178.79,1853.79) 2178.79,1890 ; 2178.79,1890 ccw(c2178.79,1926.21) 2204.39,1900.61 cw(c2178.79,1926.21) 2178.79,1890 ; pad.1@2199.21,1890 cw(c2199.21,1949.21) 2157.34,1907.34 ccw(c2199.21,1949.21) pad.1@2199.21,1890 ; pad.1@2199.21,1890 ccw(c2199.21,1830.79) 2157.34,1872.66 cw(c2199.21,1830.79) pad.1@2199.21,1890